# Altium PCB PCB1_Panel.PcbDoc
Units mm, origin at the board's own origin, x right, y up, seen from the top; angles counter-clockwise.
Board outline 245 x 245 mm, 2 copper layers (Top Layer, Bottom Layer); 19 components, 0 nets, 83 pads, 0 vias.
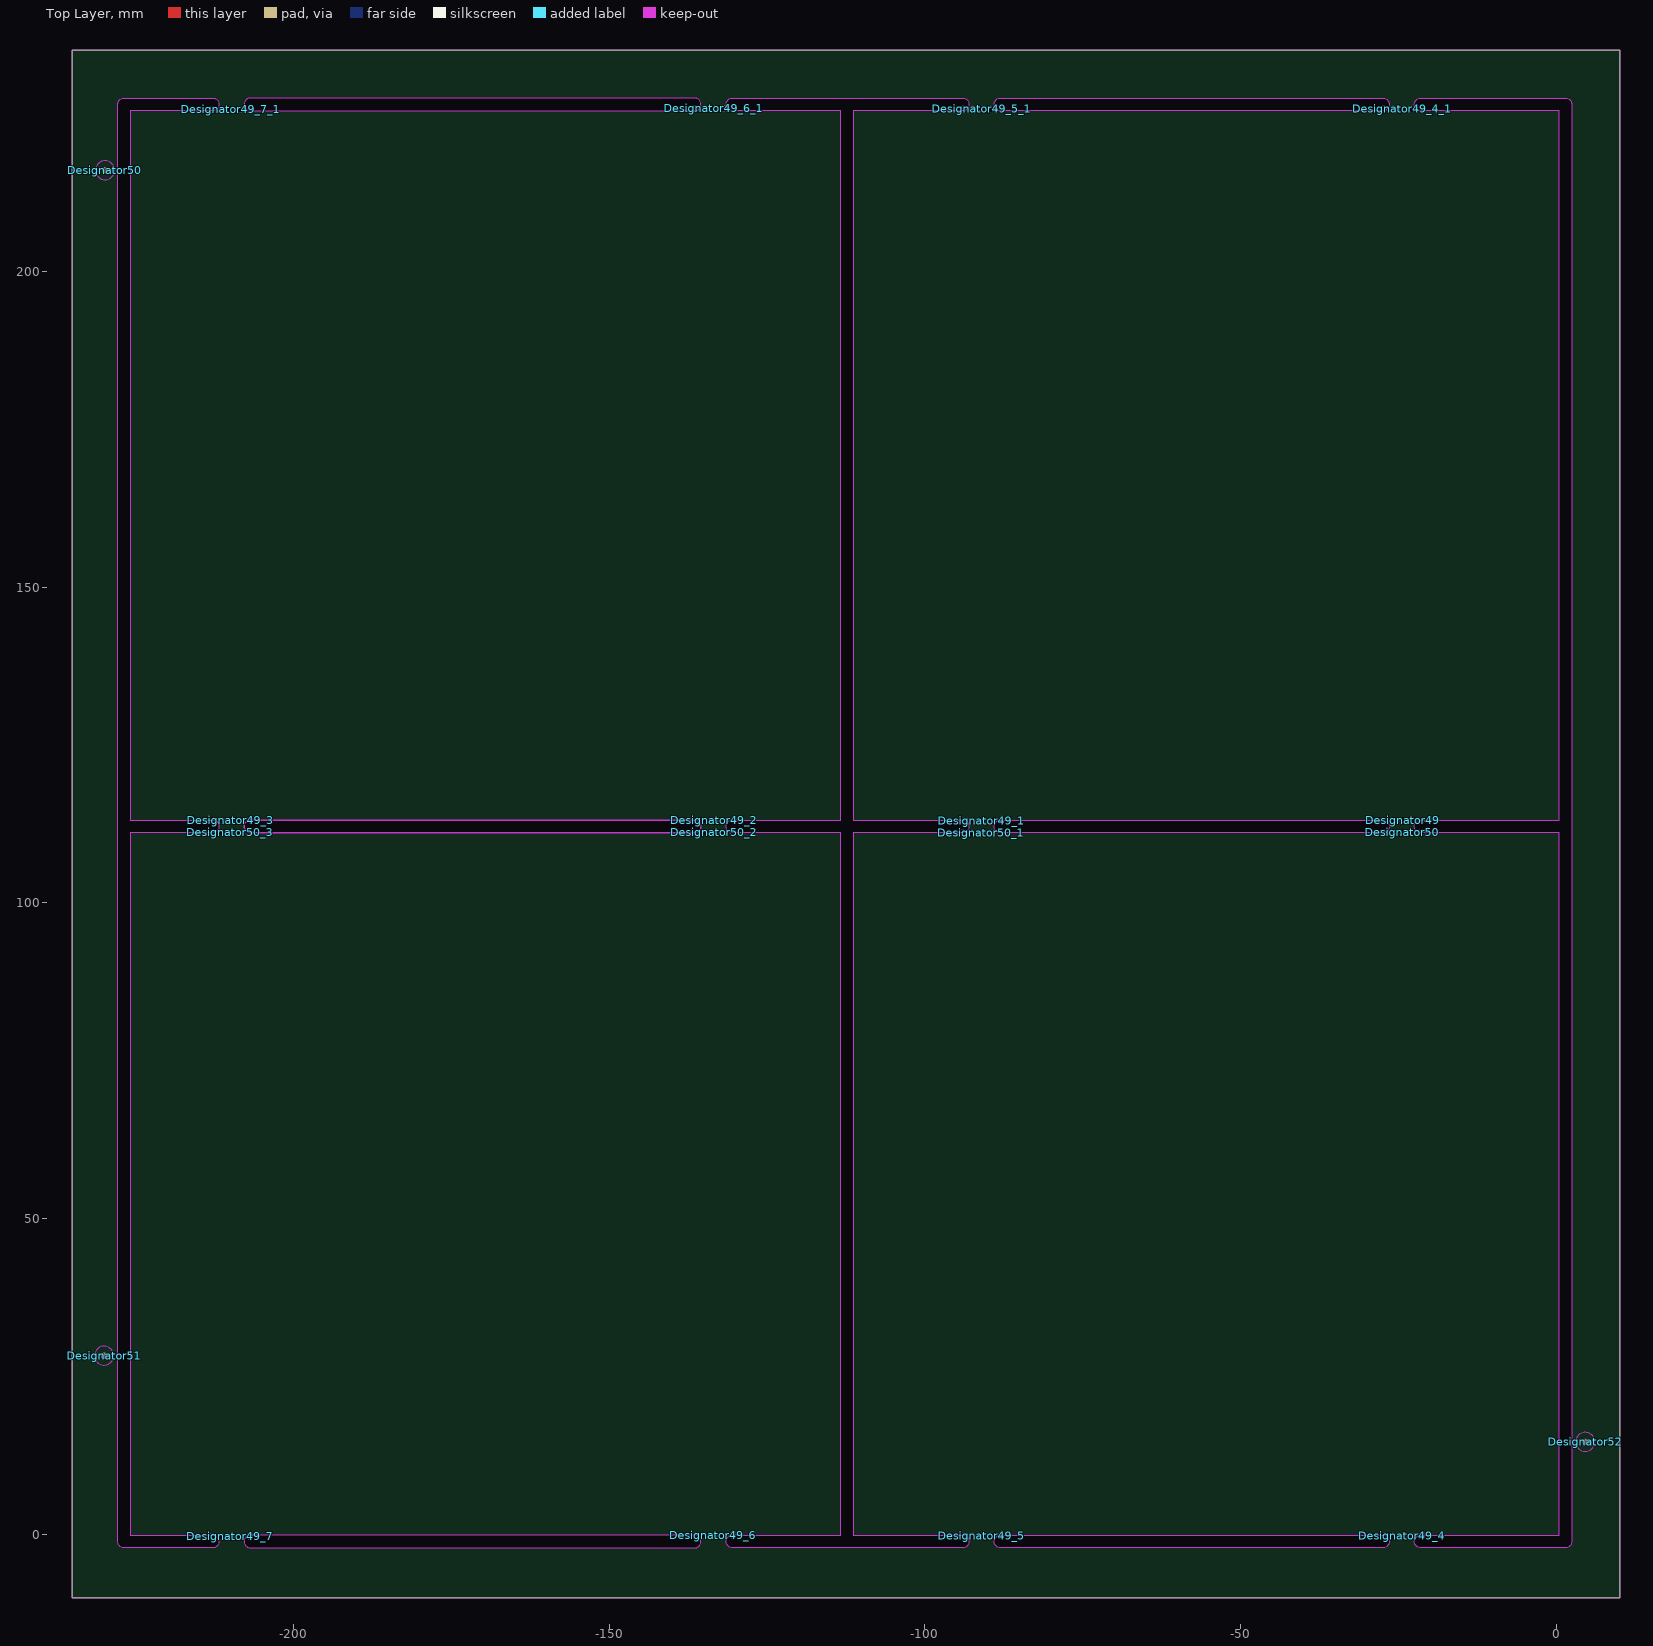
[diagram p0: Top Layer view]
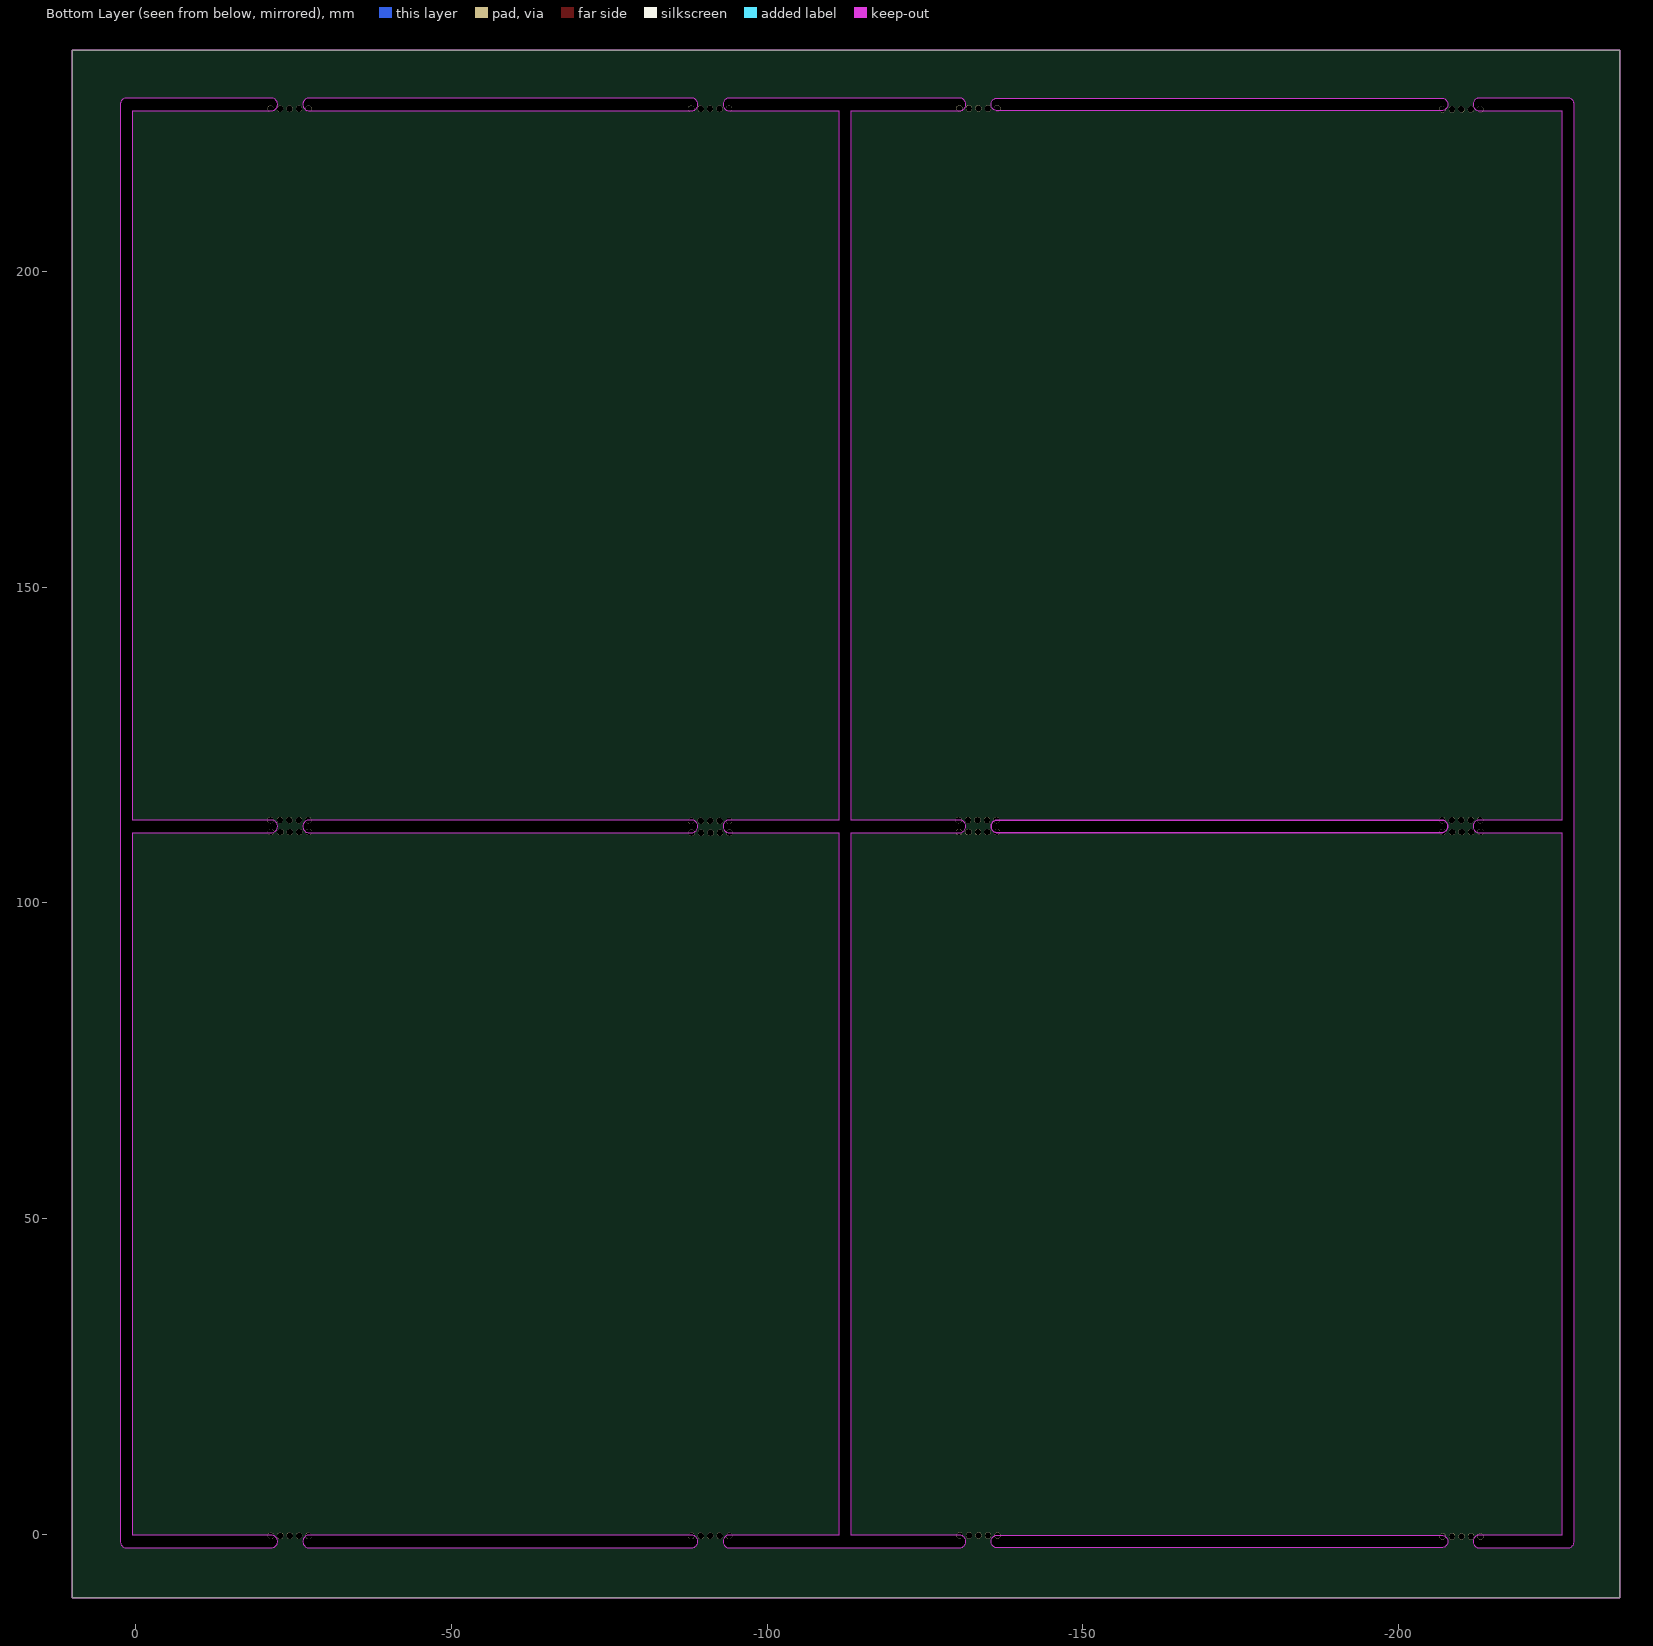
[diagram p1: Bottom Layer view, seen from below]

## Layer stack, top to bottom
Top Solder: solder mask 0.0102, Solder Resist, Dk 3.5
Top Layer: signal copper 0.0356
Dielectric 1: dielectric 0.32, FR-4, Dk 4.8
Bottom Layer: signal copper 0.0356
Bottom Solder: solder mask 0.0102, Solder Resist, Dk 3.5

## Board outline
-235,-10 10,-10 10,235 -235,235
cut-out: -88.036,-2.118 cw(c-88.036,-1.118) -88.036,-0.117 -27.483,-0.117 cw(c-27.483,-1.118) -26.482,-1.118 cw(c-27.483,-1.118) -27.483,-2.118
cut-out: -88.036,111.115 cw(c-88.036,112.116) -88.036,113.116 -27.483,113.116 cw(c-27.483,112.116) -26.482,112.116 cw(c-27.483,112.116) -27.483,111.115
cut-out: -88.036,225.441 cw(c-88.036,226.441) -88.036,227.441 -27.483,227.441 cw(c-27.483,226.441) -26.482,226.441 cw(c-27.483,226.441) -27.483,225.441
cut-out: -206.807,225.441 -136.474,225.441 ccw(c-136.474,226.441) -135.474,226.441 ccw(c-136.474,226.441) -136.474,227.441 -206.807,227.441 ccw(c-206.807,226.441)
cut-out: -206.807,111.115 cw(c-206.807,112.116) -206.807,113.116 -136.474,113.116 cw(c-136.474,112.116) -135.474,112.116 cw(c-136.474,112.116) -136.474,111.115
cut-out: -206.807,111.115 -136.474,111.115 ccw(c-136.474,112.116) -135.474,112.116 ccw(c-136.474,112.116) -136.474,113.116 -206.807,113.116 ccw(c-206.807,112.116)
cut-out: -206.807,-2.118 -136.474,-2.118 ccw(c-136.474,-1.118) -135.474,-1.118 ccw(c-136.474,-1.118) -136.474,-0.117 -206.807,-0.117 ccw(c-206.807,-1.118)
cut-out: -226.822,-2.118 cw(c-226.822,-1.118) -227.822,-1.118 -227.822,226.441 cw(c-226.822,226.441) -226.822,227.441 -212.801,227.441 cw(c-212.801,226.441) -211.801,226.441 cw(c-212.801,226.441) -212.801,225.441 -225.822,225.441 -225.822,113.116 -212.801,113.116 cw(c-212.801,112.116) -211.801,112.116 cw(c-212.801,112.116) -212.801,111.115 -225.822,111.115 -225.822,-0.117 -212.801,-0.117 cw(c-212.801,-1.118) -211.801,-1.118 cw(c-212.801,-1.118) -212.801,-2.118
cut-out: -21.488,-2.118 cw(c-21.488,-1.118) -21.488,-0.117 0.422,-0.117 0.422,111.115 -21.488,111.115 cw(c-21.488,112.116) -21.488,113.116 0.422,113.116 0.422,225.441 -21.488,225.441 cw(c-21.488,226.441) -21.488,227.441 1.422,227.441 cw(c1.422,226.441) 2.423,226.441 2.423,-1.118 cw(c1.422,-1.118) 1.422,-2.118
cut-out: -130.48,-2.118 cw(c-130.48,-1.118) -130.48,-0.117 -113.37,-0.117 -113.37,111.115 -130.48,111.115 cw(c-130.48,112.116) -130.48,113.116 -113.37,113.116 -113.37,225.441 -130.48,225.441 cw(c-130.48,226.441) -130.48,227.441 -94.031,227.441 cw(c-94.031,226.441) -93.03,226.441 cw(c-94.031,226.441) -94.031,225.441 -111.369,225.441 -111.369,113.116 -94.031,113.116 cw(c-94.031,112.116) -93.03,112.116 cw(c-94.031,112.116) -94.031,111.115 -111.369,111.115 -111.369,-0.117 -94.031,-0.117 cw(c-94.031,-1.118) -93.03,-1.118 cw(c-94.031,-1.118) -94.031,-2.118

## Design rules (kind name [scope] priority, off if disabled: settings)
Clearance [All] p1: gap=0.254 ignorepadtopadclearanceinfootprint=FALSE except(0: Arc-Hole Track-Hole SMDPad-Hole THPad-Hole Via-Hole Fill-Hole Poly-Hole Region-Hole Text-Hole)
PolygonConnect [All] p1: connectstyle=Relief reliefconductorwidth=0.254 reliefentries=4 polygonreliefangle="90 Angle" airgapwidth=0.254
RoutingVias [All] p1: holewidth=0.711 width=1.27 viastyle="Through Hole" minholewidth=0.711 minwidth=1.27 maxholewidth=0.711 maxwidth=1.27
SolderMaskExpansion [All] p1: expansion=0.102 istentingtop=FALSE
Width [All] p1: maxlimit=0.254 minlimit=0.254 preferedwidth=0.254
30 further rules are at their usual default settings.

## Components (designator, comment, footprint, x,y, rotation, side; value= is the part's Value field where it differs from the comment)
Designator49 "Comment" "Stamp Hole" -27.36,113.106 r0 top
Designator49_1 "Comment" "Stamp Hole" -93.984,113.005 r0 top
Designator49_2 "Comment" "Stamp Hole" -136.326,113.106 r0 top
Designator49_3 "Comment" "Stamp Hole" -212.932,113.106 r0 top
Designator49_4 "Comment" "Stamp Hole" -27.411,-0.203 r0 top
Designator49_4_1 "Comment" "Stamp Hole" -27.388,225.77 r0 top
Designator49_5 "Comment" "Stamp Hole" -93.998,-0.212 r0 top
Designator49_5_1 "Comment" "Stamp Hole" -93.975,225.761 r0 top
Designator49_6 "Comment" "Stamp Hole" -136.492,-0.161 r0 top
Designator49_6_1 "Comment" "Stamp Hole" -136.47,225.812 r0 top
Designator49_7 "Comment" "Stamp Hole" -212.972,-0.314 r0 top
Designator49_7_1 "Comment" "Stamp Hole" -212.949,225.659 r0 top
Designator50 "Comment" FUDICIAL_MARKER -229.845,216.027 r0 top
Designator50 "Comment" "Stamp Hole" -27.423,111.222 r0 top
Designator50_1 "Comment" "Stamp Hole" -94.047,111.12 r0 top
Designator50_2 "Comment" "Stamp Hole" -136.389,111.222 r0 top
Designator50_3 "Comment" "Stamp Hole" -212.995,111.222 r0 top
Designator51 "Comment" FUDICIAL_MARKER -229.997,28.321 r0 top
Designator52 "Comment" FUDICIAL_MARKER 4.572,14.656 r0 top

## Footprints (in the part's own frame and the unit in brackets; to place one, negate y for a bottom-side part, rotate by r counter-clockwise, add the part's x,y. Pads: shape width x height; smd on the part's side, far side on the other; paste and mask are expansions set on the pad)
FUDICIAL_MARKER [mm]
  round 1 smd paste-1 mask+1: 4(0,0)
  Top Layer pour cut-out: 0.622,1.511 1.5,0.634 1.5,-0.634 0.622,-1.511 -0.622,-1.511 -1.511,-0.622 -1.511,0.622 -0.622,1.511
  Top Layer keep-out circle w0.01: c0,0 r1.5
"Stamp Hole" [mm]
  round 1 hole 1 mask+0.102: 5(0,0) 5(1.5,0) 5(3,0) 5(4.5,0) 5(6,0)

## Nets (pads, with @x,y where several pads share a name; then routed paths per layer and width w, separated by ;. In a path a pad name is that pad's centre, name@x,y a point inside that pad or via, vN(x,y) a via of type N, cw(c..) or ccw(c..) an arc to the next point about the centre after c; other vN are vias at no path point)
pads on no net: Designator49.5 Designator49_1.5 Designator49_2.5 Designator49_3.5 Designator49_4.5 Designator49_4_1.5 Designator49_5.5 Designator49_5_1.5 Designator49_6.5 Designator49_6_1.5 Designator49_7.5 Designator49_7_1.5 Designator50.4 Designator50.5 Designator50_1.5 Designator50_2.5 Designator50_3.5 Designator51.4 Designator52.4

## Keep-outs
Keep-Out Layer:
  the board outline again, w0.254

## Silkscreen, mask and mechanical layers (free items; w line width, h text height)
Mechanical 1:
  lines w2: -226.441,112.116 -212.801,112.116 ; -212.801,-1.118 -226.822,-1.118 -226.822,225.908 -226.822,226.441 -212.801,226.441 ; -206.807,-1.118 -136.474,-1.118 ; -206.807,112.116 -136.474,112.116 ; -206.807,226.441 -136.474,226.441 ; -130.48,-1.118 -94.031,-1.118 ; -130.48,112.116 -94.031,112.116 ; -130.48,226.441 -94.031,226.441 ; -112.37,-0.914 -112.37,226.39 ; -88.036,-1.118 -27.483,-1.118 ; -88.036,112.116 -27.483,112.116 ; -88.036,226.441 -27.483,226.441 ; -21.488,-1.118 1.422,-1.118 1.422,226.441 -21.488,226.441 ; -21.488,112.116 1.295,112.116

## Panel: embedded boards
"PCB1.PcbDoc" at -0.005,0.002, 2 rows x 2 columns, spacing 115 x 115, rotation 90